# EAGLE board cinamin (EAGLE 6.6.0)
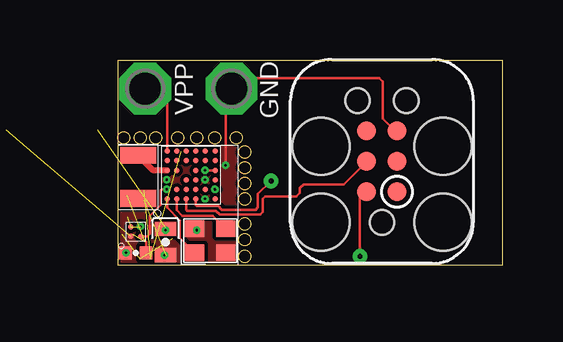
[diagram p0: board, top side]
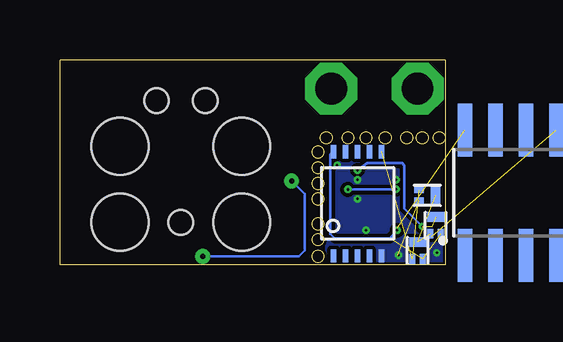
[diagram p1: board, bottom side, seen from below]

Size 16.05 x 8.55 mm. Coordinates in mm from the lower left corner, seen from the top.
Outline: 0,0 16.05,0 16.05,8.55 0,8.55 0,0
Outline: circle at 0.25,5.3 radius 0.25
Outline: circle at 0.95,5.3 radius 0.25
Outline: circle at 1.6,5.3 radius 0.25
Outline: circle at 2.5,5.3 radius 0.25
Outline: circle at 3.3,5.3 radius 0.25
Outline: circle at 4.05,5.3 radius 0.25
Outline: circle at 4.95,5.3 radius 0.25
Outline: circle at 5.3,4.7 radius 0.25
Outline: circle at 5.3,4.05 radius 0.25
Outline: circle at 5.3,3.4 radius 0.25
Outline: circle at 5.3,2.75 radius 0.25
Outline: circle at 5.3,1.7 radius 0.25
Outline: circle at 5.3,1.05 radius 0.25
Outline: circle at 5.3,0.35 radius 0.25
Copper layers (1*16): Top 0.0178mm / dielectric 59mil / Bottom 0.0178mm
Design rules "sunstone-2lyr_v1.0.0.3 *": minimum track width 6mil, minimum drill 14mil, track to track 6mil, track to pad 6mil, pad to pad 6mil, via to via 6mil, smd to smd 6mil, copper to edge 4mil, drill to drill 4mil, minimum pad ring 8mil, minimum via ring 0mil, stop-mask expansion 3mil, vias tented up to drill 15mil, thermal gap 10mil

## Footprints (pad centres in the part's own frame; a part is rotated, then mirrored left to right if it is on the bottom)
AH212M = smd 1.5 x 0.7: P1 0,0.35; P2 0,2.15
0603_CAP_SMALL = smd 0.6 x 0.9: NEG 0.55,0; POS -0.55,0
0402_CAP = smd 0.536 x 0.546: 1 -0.433,0; 2 0.433,0
SOIC-8 = smd 0.61 x 2.21: 1 -1.905,-2.616; 2 -0.635,-2.616; 3 0.635,-2.616; 4 1.905,-2.616; 5 1.905,2.616; 6 0.635,2.616; 7 -0.635,2.616; 8 -1.905,2.616
TC2030-IDC = smd 0.787 x 0.787: 1 -1.27,-0.635; 2 -1.27,0.635; 3 0,-0.635; 4 0,0.635; 5 1.27,-0.635; 6 1.27,0.635 | hole 2.375: -2.54,2.54; 0.635,2.54; 0.635,-2.54; -2.54,-2.54 | hole 1.016: -2.54,0; 2.54,1.016; 2.54,-1.016
XFDFN-3 = smd 0.4 x 0.7: D 0.35,0 | smd 0.4 x 0.25: G -0.35,0.215; S -0.35,-0.215
P1-13 = drill 1.321 pad 2.159 octagon: TP 0,0
TSOP-10 = smd 0.22 x 0.55: 1 -1,-2.2; 2 -0.5,-2.2; 3 0,-2.2; 4 0.5,-2.2; 5 1,-2.2; 6 1,2.15; 7 0.5,2.15; 8 0,2.15; 9 -0.5,2.15; 10 -1,2.15
WLCSP-34 = smd 0.22 x 0.22: A1 0,2; A2 0.4,2; A3 0.8,2; A4 1.2,2; A5 1.6,2; A6 2,2; B1 0,1.6; B2 0.4,1.6; B4 1.2,1.6; B5 1.6,1.6; B6 2,1.6; C1 0,1.2; C2 0.4,1.2; C3 0.8,1.2; C5 1.6,1.2; C6 2,1.2; D1 0,0.8; D2 0.4,0.8; D3 0.8,0.8; D4 1.2,0.8; D5 1.6,0.8; D6 2,0.8; E1 0,0.4; E2 0.4,0.4; E3 0.8,0.4; E4 1.2,0.4; E5 1.6,0.4; E6 2,0.4; F1 0,0; F2 0.4,0; F3 0.8,0; F4 1.2,0; F5 1.6,0; F6 2,0
FLIP_CHIP-4 = smd 0.22 x 0.22: A1 -0.2,-0.2; A2 -0.2,0.2; B1 0.2,-0.2; B2 0.2,0.2
TXC-8Y = smd 0.8 x 0.7: 1 -0.65,-0.5; 2 0.65,-0.5; 3 0.65,0.5; 4 -0.65,0.5

## Placement (x,y rotation side)
A1  AH212M  [AH212M]  0.86,4.92 180 top
C1  47uF  [0603_CAP_SMALL]  2,0.95 270 top
C6  1uF  [0402_CAP]  0.76,0.5 180 top
D1  CPC1822  [SOIC-8]  -2.72,3.01 0 bottom
PROG1  TC2030-JLINK-L  [TC2030-IDC]  11.02,4.31 90 top
Q1  [XFDFN-3]  1.15,0.6 90 bottom
Q2  [XFDFN-3]  0.4,1.65 90 bottom
Q3  MOSFET-NCHANNELXFDN-3  [XFDFN-3]  0.75,2.9 0 bottom
TP1  TPSPAD1-13  [P1-13]  1.15,7.35 0 top
TP2  TPSPAD1-13  [P1-13]  4.75,7.35 0 top
U1  AP4400_3.4_2.3  [TSOP-10]  3.66,2.57 0 bottom
U$3  DA14581-BGA  [WLCSP-34]  4.07,2.74 90 top
U$4  LD391151.4V  [FLIP_CHIP-4]  0.76,1.38 0 top
X1  16Mhz  [TXC-8Y]  3.86,1.01 0 top

## Library data of the parts
A1 = chips; DIGIKEY: 587-2725-1-ND
C1 C6 = passives
D1 = chips; DIGIKEY: CLA289-ND
PROG1 = connector
Q1 Q2 = fets; DIGIKEY: DMP21D5UFB4-7BDICT-ND
Q3 = fets; DIGIKEY: DMN2400UFB4-7DICT-ND
TP1 TP2 = testpad
U1 = chips; DIGIKEY: CANT_BUY
U$3 = chips; DIGIKEY: 1564-1015-1-ND
U$4 = chips; DIGIKEY: 497-15591-2-ND
X1 = crystals

## Nets
GND: C1.NEG C6.2 D1.5 PROG1.5 Q3.S TP2.TP U1.5 U$3.A3 U$3.E1 U$3.E3 U$4.A1 X1.2 X1.4
N$1: TP1.TP U$3.A6
N$2: Q1.G Q3.G U1.6
N$3: C1.POS D1.8 Q1.S Q2.S U1.10
N$4: Q1.D Q2.G Q3.D
N$5: U$3.B1 X1.3
N$7: U$3.A1 X1.1
N$8: A1.P1 U$3.A4
OUT: C6.1 U$3.A2 U$3.F2 U$4.B1
SW_CLK: PROG1.4 U$3.C1
SWDIO: PROG1.2 U$3.D1
VCC: Q2.D U$3.E4 U$3.F4 U$4.A2 U$4.B2
VCC_EXT: PROG1.1

## Tracks (layer width: path | path; a pad name or v marks a point on that pad's centre or on a via)
GND  (via drill 0.1 pad 0.3)  (2 unrouted)
  Top 0.102: PROG1.5 11.57,5.58 11.05,6.1 11.05,7.65 10.9,7.8 5.2,7.8 TP2.TP 4.5,7.1 v4.5,4.15
  other vias: 3.65,3.55 3.65,3.55 3.65,2.75 3.3,1.45 1.95,0.4 0.35,0.5 2.05,3.55
  pour Top (isolate 0.102, no thermals): 0,0 0,2.2 1.85,2.2 1.85,5 5,5 5,0
  pour Bottom (isolate 0.102, no thermals): 0,0 0,2.2 1.85,2.2 1.85,5 5,5 5,0
N$1
  Top 0.102: U$3.A6 2.07,6.79 TP1.TP
N$2  (2 unrouted)
N$3  (via drill 0.1 pad 0.3)  (3 unrouted)
  Top 0.102: v2,1.45 2,1.55 C1.POS
  Bottom 0.102: U1.10 4.68,4.72 4.8,4.6 4.8,1.3 4.6,1.1 2.3,1.1 v2,1.45
N$4  (2 unrouted)
N$5
  Top 0.102: U$3.B1 2.47,2.29 2.7,2.05 3.97,2.05 X1.3
N$7
  Top 0.102: U$3.A1 2.07,2.39 2.6,1.85 2.6,1.12 X1.1
N$8
  Top 0.254: U$3.A4 1.49,3.94 A1.P1
OUT  (via drill 0.1 pad 0.3)
  Top 0.102: C6.1 1.19,0.95 U$4.B1 1.24,1.18 1.35,1.3 1.35,2.05 1.8,2.5 1.8,3.1 1.85,3.14 U$3.A2 v2.05,3.15 | U$3.F2 v4.05,3.15
  Bottom 0.102: U$3.F2 U$3.A2 v2.05,3.15
  other vias: 4.06,3.14
SW_CLK
  Top 0.102: U$3.C1 2.87,2.29 2.9,2.25 4.1,2.25 4.25,2.1 5.95,2.1 6.05,2.2 6.05,2.75 6.15,2.85 7.45,2.85 7.6,3 7.6,3.2 7.75,3.35 9.42,3.35 PROG1.4
SWDIO  (via drill 0.2 pad 0.61)
  Top 0.102: U$3.D1 3.27,2.49 3.3,2.45 4.2,2.45 4.35,2.3 5.75,2.3 5.85,2.4 5.85,2.95 v6.4,3.5 | v10.1,0.35 10.1,2.76 PROG1.2
  Bottom 0.102: v10.1,0.35 6.1,0.35 5.85,0.6 5.85,2.95 v6.4,3.5
VCC  (via drill 0.1 pad 0.3)  (3 unrouted)
  Top 0.102: U$3.F4 U$3.E4 v3.65,3.95 | U$4.B2 v0.95,1.6
  Bottom 0.102: v3.65,3.95 3.25,4.25 1.8,4.25 1.7,4.15 1.7,2.35 v0.95,1.6

## Text on the board
tNames: VPP | GND